# Altium PCB STM.PcbDoc
Units mm, origin at the board's own origin, x right, y up, seen from the top; angles counter-clockwise.
Board outline 82.75 x 86.5 mm, 4 copper layers (Top Layer, GND, Power, Bottom Layer), stack 0.651 mm thick; 136 components, 76 nets, 439 pads, 150 vias.
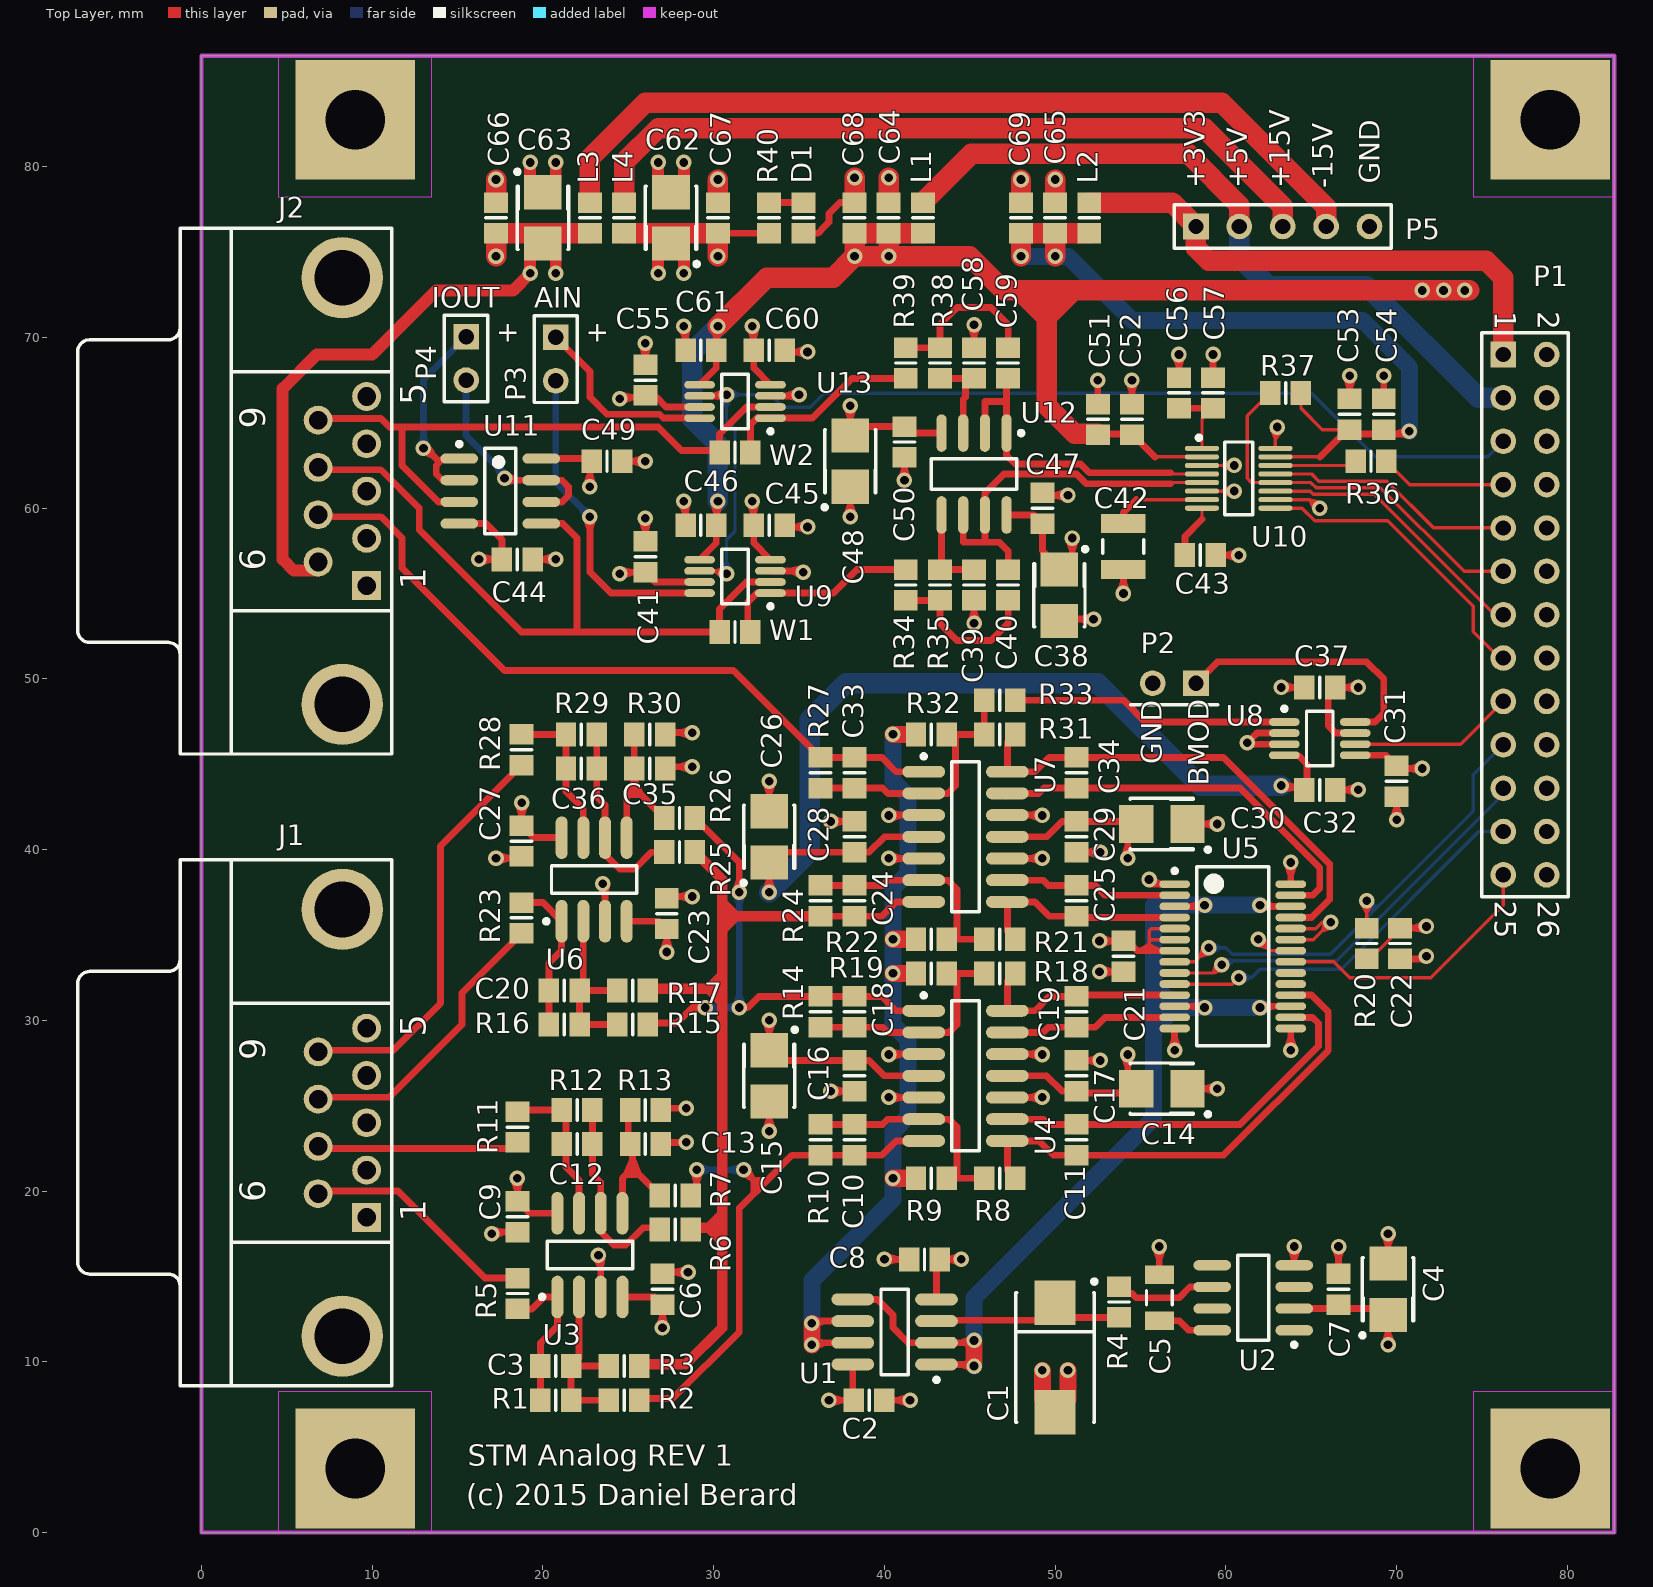
[diagram p0: Top Layer view]
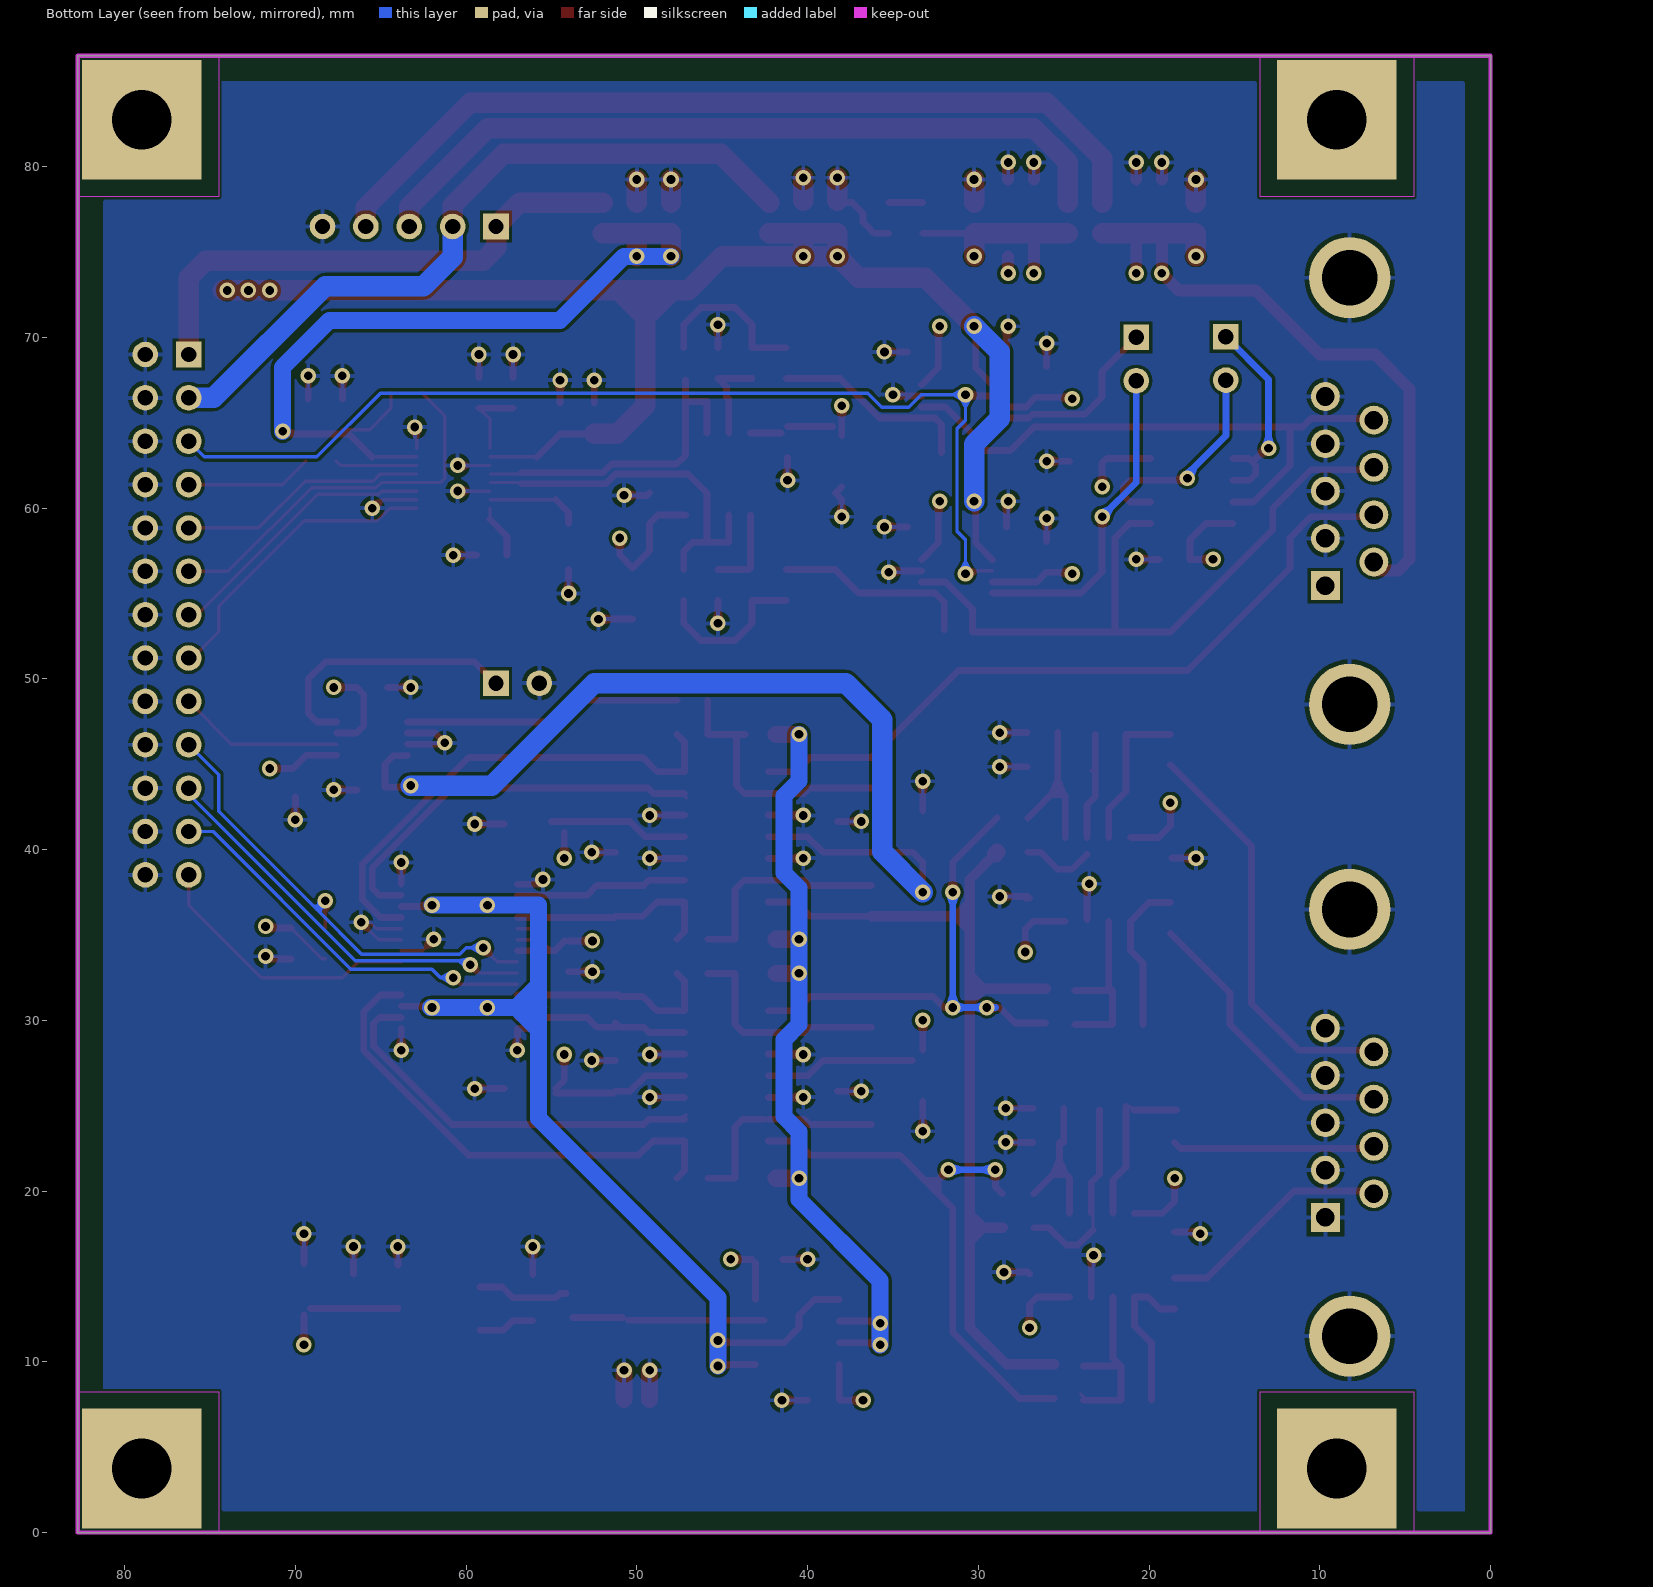
[diagram p1: Bottom Layer view, seen from below]
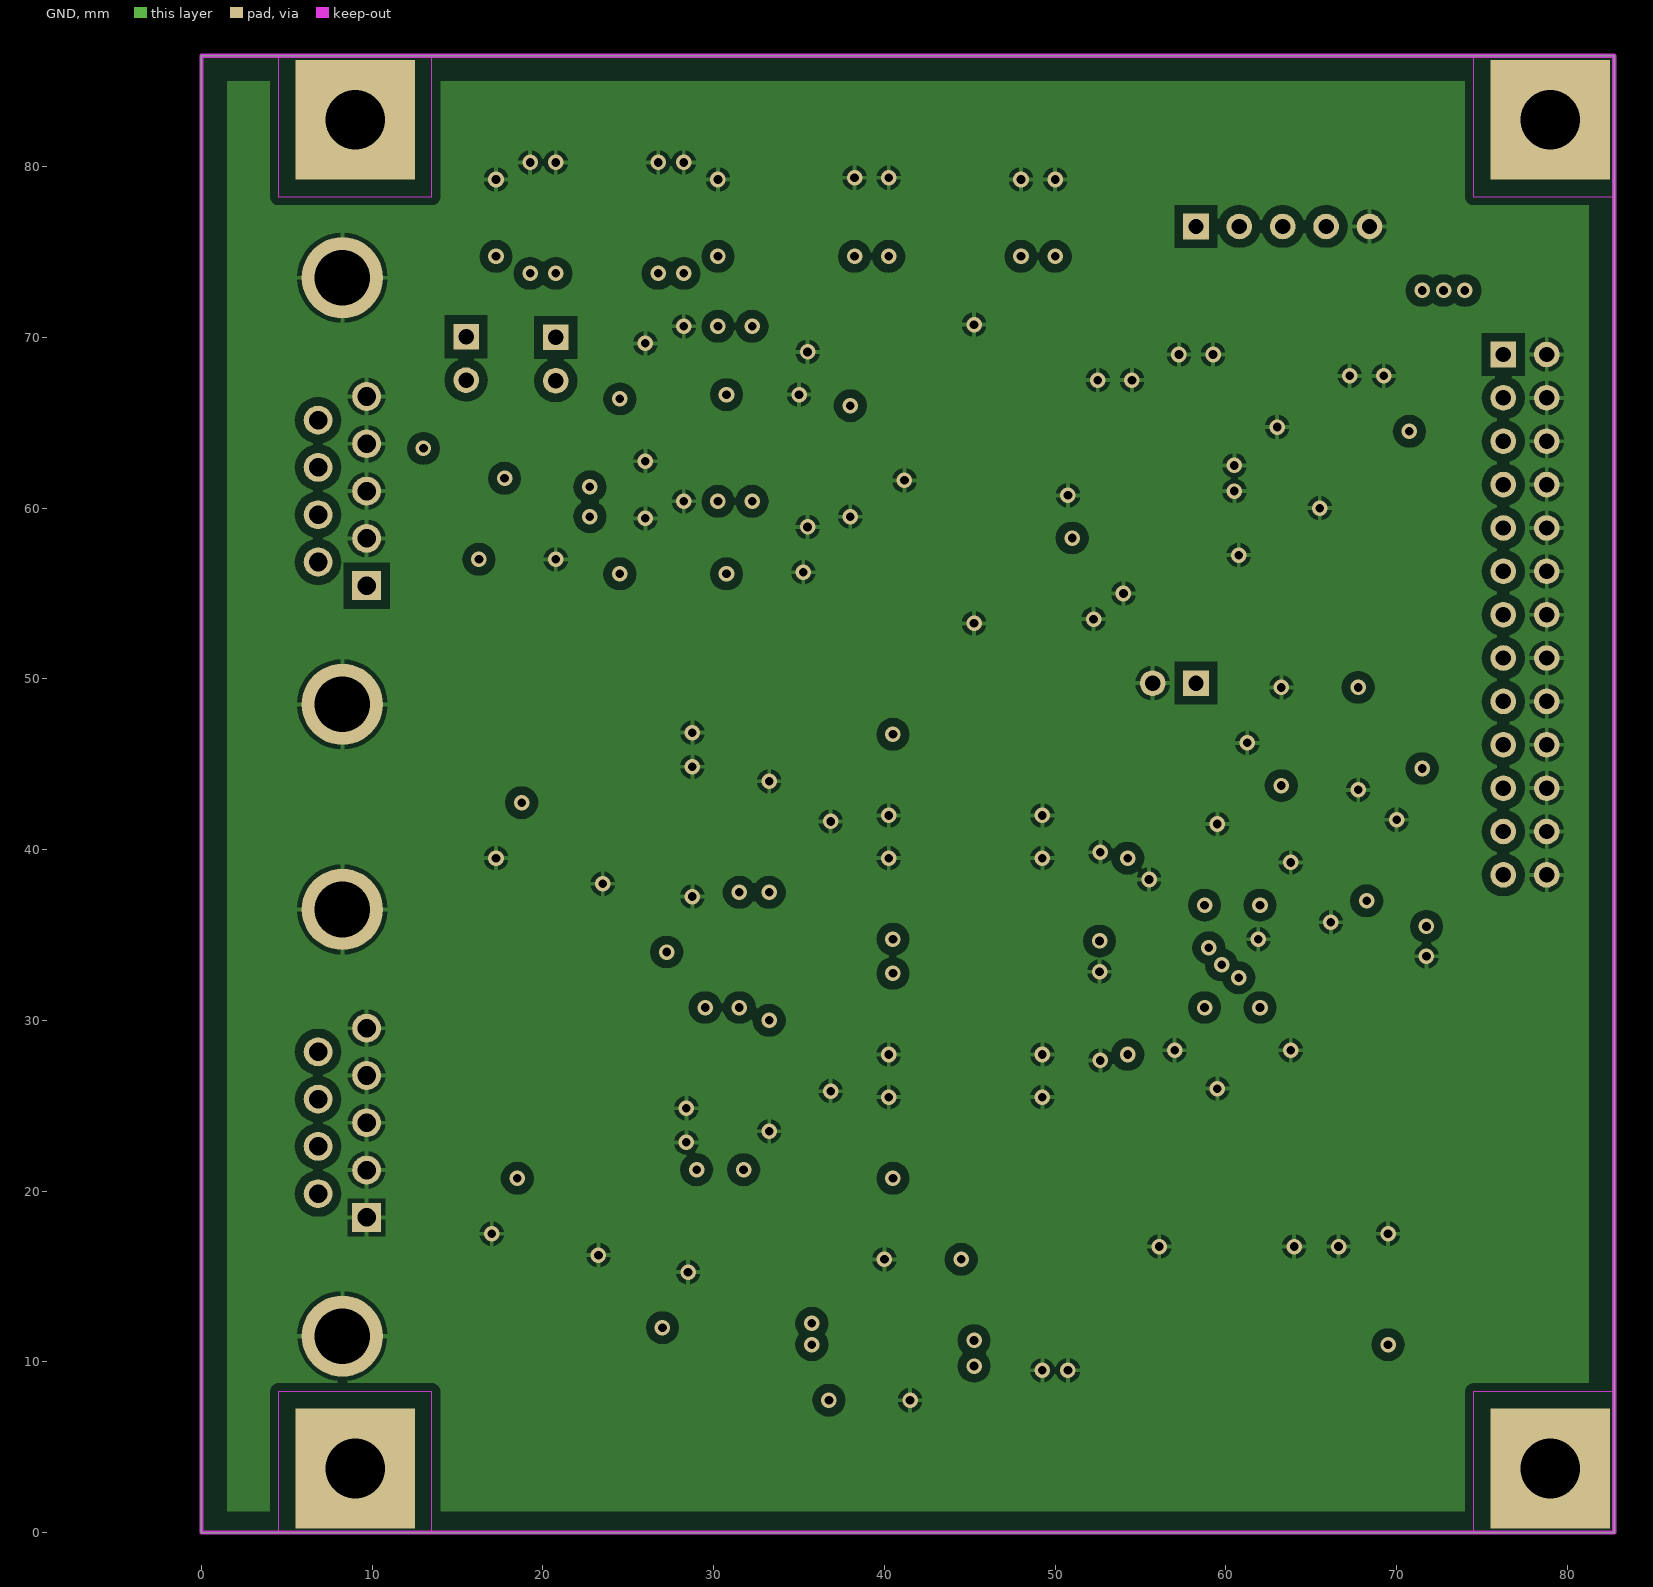
[diagram p2: GND]
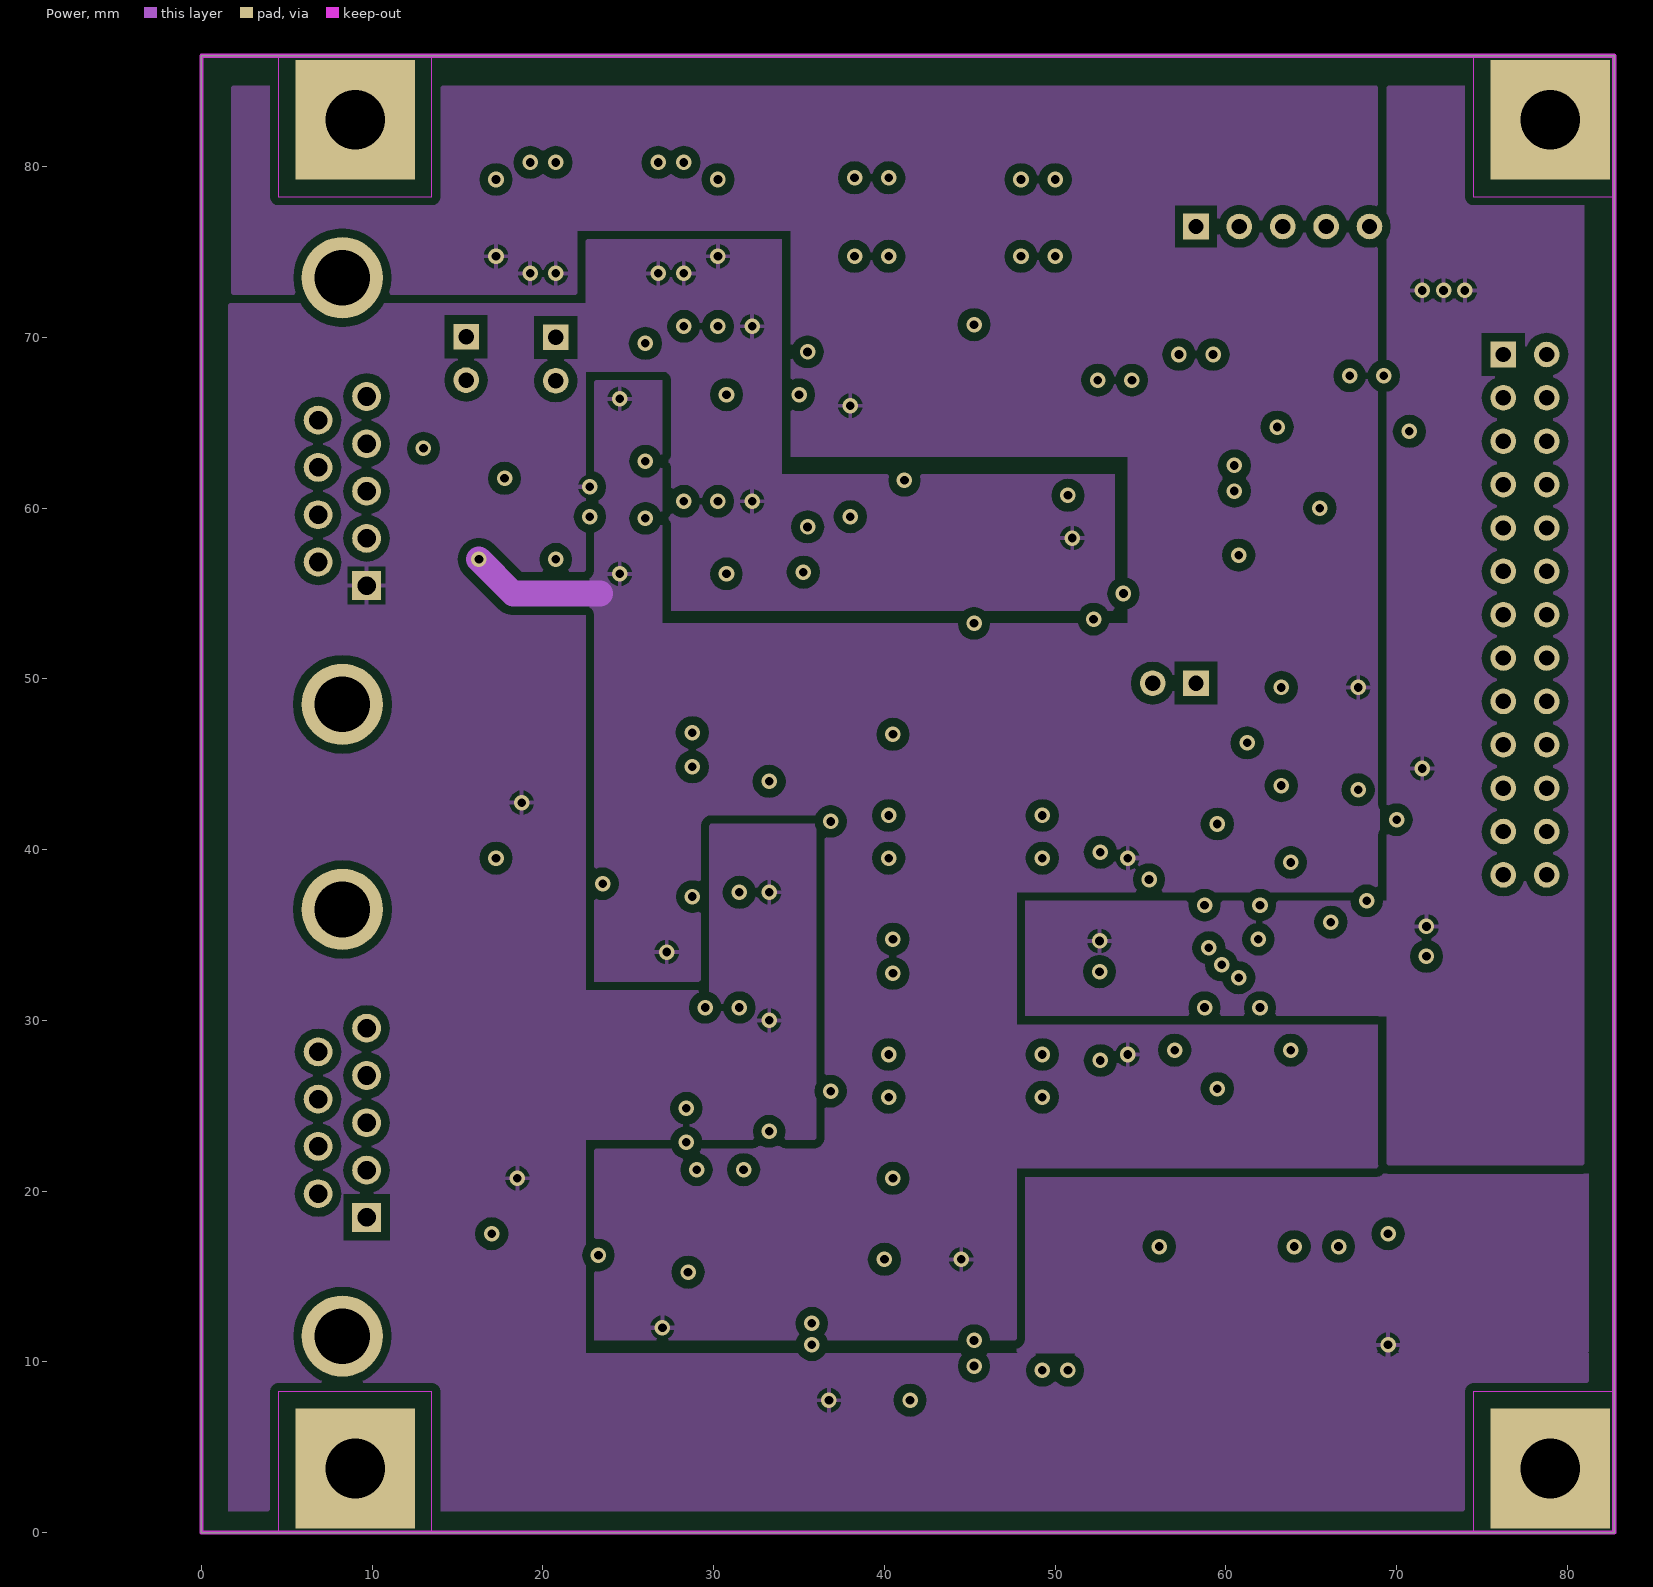
[diagram p3: Power]

## Layer stack, top to bottom
Top Solder: solder mask 0.0102, Solder Resist, Dk 3.5
Top Layer: signal copper 0.0356
Dielectric 1: prepreg 0.127, FR-4, Dk 4.2
GND: signal copper 0.036
Dielectric 5: core 0.254, Dk 4.2
Power: signal copper 0.036
Dielectric 6: prepreg 0.127, Dk 4.2
Bottom Layer: signal copper 0.0356
Bottom Solder: solder mask 0.0102, Solder Resist, Dk 3.5

## Board outline
0,0 0,86.5 82.75,86.5 82.75,0

## Design rules (kind name [scope] priority, off if disabled: settings)
Clearance [(InPolygon AND OnLayer('Power') OR OnLayer('GND'))] p1: gap=0.5
Clearance Clearance_1 [All] p2: gap=0.18
PolygonConnect [All] p1: connectstyle=Relief reliefconductorwidth=0.254 reliefentries=4 polygonreliefangle="90 Angle" airgapwidth=0.254
RoomDefinition ADC [InComponentClass('ADC')] p1: confinementstyle=ConfineIn formatcopy=TRUE lockcomponents=FALSE outline 10.75,51.75 74,51.75 74,73 10.75,73
RoomDefinition DAC [InComponentClass('DAC')] p2: confinementstyle=ConfineIn formatcopy=TRUE lockcomponents=FALSE outline 31.25,50.5 31.25,3.75 71.5,3.75 71.5,50.5
RoomDefinition "Piezo Driver" [InComponentClass('Piezo Driver')] p3: confinementstyle=ConfineIn formatcopy=TRUE lockcomponents=FALSE outline 30.25,6.5 30.25,49.75 16,49.75 16,6.5
RoutingVias [All] p1: holewidth=0.508 width=0.91 viastyle="Through Hole" minholewidth=0.5 minwidth=0.9 maxholewidth=0.711 maxwidth=1.27
SolderMaskExpansion [All] p1: expansion=0.102
UnpouredPolygon [All] p1: allowunpoured=FALSE
Width [All] p1: maxlimit=5 minlimit=0.2 preferedwidth=0.2 midlayer2_maxwidth=0.2 minimp=50.000000 maximp=50.000000 favimp=50.000000
29 further rules are at their usual default settings.

## Classes and differential pairs
component class ADC: C38 C39 C40 C41 C42 C43 C44 C45 C46 C47 C48 C49 C50 C51 C52 C53 C54 C55 C56 C57 C58 C59 C60 C61 R34 R35 R36 R37 R38 R39 U9 U10 U11 U12 U13 W1 W2
component class DAC: C1 C2 C4 C5 C7 C8 C10 C11 C14 C15 C16 C17 C18 C19 C21 C22 C24 C25 C26 C28 C29 C30 C31 C32 C33 C34 C37 R4 R8 R9 R10 R14 R18 R19 R20 R21 R22 R24 R27 R31 R32 R33 U1 U2 U4 U5 U7 U8
component class "Piezo Driver": C3 C6 C9 C12 C13 C20 C23 C27 C35 C36 R1 R2 R3 R5 R6 R7 R11 R12 R13 R15 R16 R17 R23 R25 R26 R28 R29 R30 U3 U6
component class Connectors: C62 C63 C64 C65 C66 C67 C68 C69 D1 J1 J2 L1 L2 L3 L4 P1 P2 P3 P4 P5 R40

## Components (designator, comment, footprint, x,y, rotation, side; value= is the part's Value field where it differs from the comment)
C1 "100uF" 7343 50,10.25 r270 top (schematic designator C18)
C2 "100nF" 6-0805_N 39.1,7.75 r180 top (schematic designator C25)
C3 "4.7nF" 6-0805_N 20.75,9.75 r180 top (schematic designator C45)
C4 "10uF" 3528 69.5,14.25 r90 top (schematic designator C19)
C5 "2.2uF" C1206 56.1,13.75 r90 top (schematic designator C22)
C6 "100nF" 6-0805_N 27,14.25 r90 top (schematic designator C53)
C7 "100nF" 6-0805_N 66.6,14.25 r90 top (schematic designator C32)
C8 "100nF" 6-0805_N 42.35,16 r180 top (schematic designator C38)
C9 "100nF" 6-0805_N 18.5,18.5 r90 top (schematic designator C51)
C10 "4.7nF" 6-0805_N 38.25,23 r270 top (schematic designator C20)
C11 "3.3nF" 6-0805_N 51.25,23 r270 top (schematic designator C31)
C12 "4.7nF" 6-0805_N 22,22.75 r180 top (schematic designator C44)
C13 "4.7nF" 6-0805_N 26,22.75 r180 top (schematic designator C49)
C14 "10uF" 3528 56.25,26 r180 top (schematic designator C40)
C15 "10uF" 3528 33.25,26.75 r270 top (schematic designator C21)
C16 "100nF" 6-0805_N 38.25,26.75 r90 top (schematic designator C26)
C17 "100nF" 6-0805_N 51.25,26.75 r90 top (schematic designator C39)
C18 "4.7nF" 6-0805_N 38.25,30.5 r90 top (schematic designator C17)
C19 "3.3nF" 6-0805_N 51.25,30.5 r90 top (schematic designator C28)
C20 "4.7nF" 6-0805_N 21.25,31.75 r0 top (schematic designator C46)
C21 "100nF" 6-0805_N 54,33.75 r90 top (schematic designator C33)
C22 "10uF" 6-0805_N 70.2,34.5 r270 top (schematic designator C36)
C23 "100nF" 6-0805_N 27.25,36.25 r90 top (schematic designator C54)
C24 "4.7nF" 6-0805_N 38.25,37 r270 top (schematic designator C16)
C25 "3.3nF" 6-0805_N 51.25,37 r270 top (schematic designator C47)
C26 "10uF" 3528 33.25,40.75 r90 top (schematic designator C72)
C27 "100nF" 6-0805_N 18.75,40.5 r90 top (schematic designator C52)
C28 "100nF" 6-0805_N 38.25,40.75 r270 top (schematic designator C24)
C29 "100nF" 6-0805_N 51.25,40.75 r270 top (schematic designator C37)
C30 "10uF" 3528 56.25,41.5 r180 top (schematic designator C41)
C31 "100nF" 6-0805_N 70,44 r90 top (schematic designator C84)
C32 "100nF" 6-0805_N 65.5,43.5 r180 top (schematic designator C75)
C33 "4.7nF" 6-0805_N 38.25,44.5 r90 top (schematic designator C23)
C34 "3.3nF" 6-0805_N 51.25,44.5 r90 top (schematic designator C43)
C35 "4.7nF" 6-0805_N 26.25,44.75 r180 top (schematic designator C50)
C36 "4.7nF" 6-0805_N 22.25,44.75 r0 top (schematic designator C48)
C37 "100nF" 6-0805_N 65.5,49.5 r180 top (schematic designator C85)
C38 "10uF" 3528 50.25,54.9 r270 top (schematic designator C35)
C39 "3.3nF" 6-0805_N 45.25,55.5 r270 top (schematic designator C29)
C40 "3.3nF" 6-0805_N 47.25,55.5 r270 top (schematic designator C5)
C41 "100nF" 6-0805_N 26,57.15 r90 top (schematic designator C15)
C42 "47uF" C1210 54,57.75 r90 top (schematic designator C3)
C43 "100nF" 6-0805_N 58.5,57.25 r180 top (schematic designator C2)
C44 "100nF" 6-0805_N 18.5,57 r0 top (schematic designator C34)
C45 "100nF" 6-0805_N 33.25,59 r180 top (schematic designator C7)
C46 "100nF" 6-0805_N 29.25,59 r0 top (schematic designator C9)
C47 "100nF" 6-0805_N 49.25,60 r270 top (schematic designator C6)
C48 "10uF" 3528 38,62.75 r90 top (schematic designator C71)
C49 "100nF" 6-0805_N 23.75,62.75 r180 top (schematic designator C30)
C50 "100nF" 6-0805_N 41.175,63.875 r270 top (schematic designator C13)
C51 "10uF" 6-0805_N 52.5,65.2 r90 top (schematic designator C42)
C52 "100nF" 6-0805_N 54.5,65.2 r270 top (schematic designator C11)
C53 "100nF" 6-0805_N 67.25,65.5 r270 top (schematic designator C12)
C54 "10uF" 6-0805_N 69.25,65.5 r90 top (schematic designator C70)
C55 "100nF" 6-0805_N 26,67.5 r90 top (schematic designator C14)
C56 "100nF" 6-0805_N 57.25,66.75 r270 top (schematic designator C73)
C57 "10uF" 6-0805_N 59.25,66.75 r90 top (schematic designator C4)
C58 "3.3nF" 6-0805_N 45.25,68.5 r90 top (schematic designator C27)
C59 "3.3nF" 6-0805_N 47.25,68.5 r90 top (schematic designator C1)
C60 "100nF" 6-0805_N 33.25,69.25 r180 top (schematic designator C8)
C61 "100nF" 6-0805_N 29.25,69.25 r0 top (schematic designator C10)
C62 "10uF" 3528 27.5,77 r90 top (schematic designator C80)
C63 "10uF" 3528 20,77 r270 top (schematic designator C82)
C64 "10uF" 6-0805_N 40.25,77 r90 top (schematic designator C86)
C65 "10uF" 6-0805_N 50,77 r90 top (schematic designator C78)
C66 "100nF" 6-0805_N 17.25,77 r270 top (schematic designator C83)
C67 "100nF" 6-0805_N 30.25,77 r90 top (schematic designator C81)
C68 "100nF" 6-0805_N 38.25,77 r90 top (schematic designator C87)
C69 "100nF" 6-0805_N 48,77 r90 top (schematic designator C79)
D1 "" 6-0805_N 35.25,77 r270 top (schematic designator D7)
J1 "D Connector 9" DSUB1.385-2H9 -1.25,24 r90 top
J2 "D Connector 9" DSUB1.385-2H9 -1.25,61 r90 top
L1 "600 Ohm" 6-0805_N 42.25,77 r90 top (schematic designator L2)
L2 "600 Ohm" 6-0805_N 52,77 r90 top (schematic designator L1)
L3 "600 Ohm" 6-0805_N 22.75,77 r90 top (schematic designator L4)
L4 "600 Ohm" 6-0805_N 24.75,77 r90 top (schematic designator L3)
P1 "Header 13X2" HDR2X13 76.25,69 r270 top (schematic designator P2)
P2 "Header 2" HDR1X2 58.25,49.75 r180 top (schematic designator P9)
P3 "Header 2" HDR1X2 20.75,70 r270 top (schematic designator P10)
P4 "Header 2" HDR1X2 15.5,70.04 r270 top
P5 "Header 5" HDR1X5 58.25,76.5 r0 top (schematic designator P8)
R1 "3k" 6-0805_N 20.75,7.75 r180 top (schematic designator R24)
R2 "3k" 6-0805_N 24.75,7.75 r180 top (schematic designator R28)
R3 "3k" 6-0805_N 24.75,9.75 r180 top (schematic designator R26)
R4 "1k" 6-0805_N 53.75,13.5 r270 top (schematic designator R14)
R5 "220" 6-0805_N 18.5,14 r90 top (schematic designator R30)
R6 "3k" 6-0805_N 27.75,17.75 r180 top (schematic designator R34)
R7 "3k" 6-0805_N 27.75,19.75 r180 top (schematic designator R38)
R8 "1.5k" 6-0805_N 46.75,20.75 r180 top (schematic designator R42)
R9 "3k" 6-0805_N 42.75,20.75 r0 top (schematic designator R15)
R10 "3k" 6-0805_N 36.25,23 r270 top (schematic designator R16)
R11 "220" 6-0805_N 18.5,23.75 r270 top (schematic designator R36)
R12 "3k" 6-0805_N 22,24.75 r180 top (schematic designator R32)
R13 "3k" 6-0805_N 26,24.75 r180 top (schematic designator R40)
R14 "3k" 6-0805_N 36.25,30.5 r90 top (schematic designator R10)
R15 "3k" 6-0805_N 25.25,29.75 r180 top (schematic designator R29)
R16 "3k" 6-0805_N 21.25,29.75 r0 top (schematic designator R25)
R17 "3k" 6-0805_N 25.25,31.75 r180 top (schematic designator R27)
R18 "1.5k" 6-0805_N 46.75,32.75 r180 top (schematic designator R13)
R19 "3k" 6-0805_N 42.75,32.75 r0 top (schematic designator R9)
R20 "10k" 6-0805_N 68.25,34.5 r270 top (schematic designator R17)
R21 "1.5k" 6-0805_N 46.75,34.75 r180 top (schematic designator R7)
R22 "3k" 6-0805_N 42.75,34.75 r0 top (schematic designator R4)
R23 "220" 6-0805_N 18.75,36 r270 top (schematic designator R31)
R24 "3k" 6-0805_N 36.25,37 r270 top (schematic designator R5)
R25 "3k" 6-0805_N 28,39.85 r180 top (schematic designator R35)
R26 "3k" 6-0805_N 28,41.85 r180 top (schematic designator R39)
R27 "3k" 6-0805_N 36.25,44.5 r90 top (schematic designator R21)
R28 "220" 6-0805_N 18.75,45.85 r270 top (schematic designator R37)
R29 "3k" 6-0805_N 22.25,46.75 r180 top (schematic designator R33)
R30 "3k" 6-0805_N 26.25,46.75 r180 top (schematic designator R41)
R31 "1.5k" 6-0805_N 46.75,46.75 r180 top (schematic designator R23)
R32 "3k" 6-0805_N 42.75,46.75 r0 top (schematic designator R20)
R33 "30k" 6-0805_N 46.75,48.75 r0 top (schematic designator R19)
R34 "470" 6-0805_N 41.25,55.5 r270 top (schematic designator R2)
R35 "470" 6-0805_N 43.25,55.5 r90 top (schematic designator R8)
R36 "100" 6-0805_N 68.5,62.75 r180 top (schematic designator R6)
R37 "10k" 6-0805_N 63.5,66.75 r0 top (schematic designator R12)
R38 "470" 6-0805_N 43.25,68.5 r270 top (schematic designator R3)
R39 "470" 6-0805_N 41.25,68.5 r90 top (schematic designator R1)
R40 "3k" 6-0805_N 33.25,77 r270 top (schematic designator R43)
U1 "OPA2227" ADI-R-8_M 40.6,11.75 r180 top (schematic designator U9)
U2 "REF102" 182H_N 61.6,13.75 r180 top (schematic designator U11)
U3 "OPA2227" ADI-R-8_M 22.75,16.25 r90 top (schematic designator U14)
U4 "OPA4227" TI-D14_M 44.75,26.75 r0 top (schematic designator U7)
U5 "DAC8814" TI-DB28_L 60.4,33.75 r0 top (schematic designator U8)
U6 "OPA2227" ADI-R-8_M 23,38.25 r90 top (schematic designator U15)
U7 "OPA4227" TI-D14_M 44.75,40.75 r0 top (schematic designator U5)
U8 "ADG419" ADI-RM-8_N 65.5,46.5 r0 top (schematic designator U6)
U9 "ADG419" ADI-RM-8_N 31.25,56 r180 top (schematic designator U3)
U10 "LTC2326-16" MSOP-16 60.75,61.75 r0 top (schematic designator U4)
U11 "OPA2227" TI-D8_N 17.5,61 r0 top (schematic designator U16)
U12 "LT1469" LT-S8-8_N 45.25,62 r270 top (schematic designator U1)
U13 "ADG419" ADI-RM-8_N 31.25,66.25 r180 top (schematic designator U2)
W1 "0-Ohm Jumper" 6-0805_N 31.25,52.75 r0 top (schematic designator W2)
W2 "0-Ohm Jumper" 6-0805_N 31.25,63.25 r0 top (schematic designator W1)

## Footprints (in the part's own frame and the unit in brackets; to place one, negate y for a bottom-side part, rotate by r counter-clockwise, add the part's x,y. Pads: shape width x height; smd on the part's side, far side on the other; paste and mask are expansions set on the pad)
6-0805_N [mm] "Chip Resistor, Body 2.0x1.2mm, IPC Medium Density"
  rect 1.2x1.4 smd: 1(-0.9,0) 2(0.9,0)
  silkscreen extent 0,-0.6 0,0.6, body extent -1.07,-0.7 1.07,0.7, height 0.7
182H_N [mm] "SOIC, 8-Leads, Body 4.9x3.9mm, Pitch 1.27mm, IPC Medium Density"
  oval 2.2x0.6 smd: 1(-2.4,1.905) 2(-2.4,0.635) 3(-2.4,-0.635) 4(-2.4,-1.905) 5(2.4,-1.905) 6(2.4,-0.635) 7(2.4,0.635) 8(2.4,1.905)
  silkscreen extent -2.53,-2.5 0.9,2.88, body extent -1.95,-2.45 1.95,2.45, height 1.75
3528 [mm] "Capacitor, SM Tantalum; Body 3.5 x 2.8 mm (LxW typ)"
  rect 2x2.2 smd: 1(-1.5,0) 2(1.5,0)
  silkscreen extent -2.82,-1.5 1.85,1.62
7343 [mm] "Capacitor, SM Tantalum; Body 7.3 x 4.3 mm (LxW typ)"
  rect 2.6x2.4 smd: 1(-3.2,0) 2(3.2,0)
  silkscreen extent -4.57,-2.3 3.8,2.43
ADI-R-8_M [mm] "SOIC, 8-Leads, Body 4.9x3.9mm, Pitch 1.27mm, IPC Low Density"
  oval 2.5x0.7 smd: 1(-2.45,1.905) 2(-2.45,0.635) 3(-2.45,-0.635) 4(-2.45,-1.905) 5(2.45,-1.905) 6(2.45,-0.635) 7(2.45,0.635) 8(2.45,1.905)
  silkscreen extent -2.58,-2.5 0.8,2.93, body extent -2,-2.5 2,2.5, height 1.75
ADI-RM-8_N [mm] "SOP, 8-Leads, Body 3x3mm, Pitch 0.65mm, IPC Medium Density"
  oval 1.8x0.45 smd: 1(-2.075,0.975) 2(-2.075,0.325) 3(-2.075,-0.325) 4(-2.075,-0.975) 5(2.075,-0.975) 6(2.075,-0.325) 7(2.075,0.325) 8(2.075,0.975)
  silkscreen extent -2.2,-1.6 0.77,1.87, body extent -1.6,-1.6 1.6,1.6, height 1.1
C1206 [mm] "Chip Capacitor, Body 3.2x1.6mm, IPC High Density"
  rect 1.1x1.7 smd: 1(-1.35,0) 2(1.35,0)
  silkscreen extent -0.4,-0.75 0.4,0.75, body extent -1.7,-0.9 1.7,0.9, height 1.3
C1210 [mm] "Chip Capacitor, Body 3.2x2.5mm, IPC High Density"
  rect 1.1x2.6 smd: 1(-1.35,0) 2(1.35,0)
  silkscreen extent -0.4,-1.2 0.4,1.2, body extent -1.7,-1.35 1.7,1.35, height 1.3
DSUB1.385-2H9 [mm] "Connector; D Subminiature; 9 Position; Right Angle; Pitch 1.385 mm"
  rect 1.69x1.69 hole 1.09: 1(-5.54,-10.92)
  round 1.69 hole 1.09: 2(-2.77,-10.92) 3(0,-10.92) 4(2.77,-10.92) 5(5.54,-10.92) 6(-4.155,-8.08) 7(-1.385,-8.08) 8(1.385,-8.08) 9(4.155,-8.08)
  round 4.76 hole 3.26: 10(-12.495,-9.5) 11(12.495,-9.5)
  silkscreen extent -15.4,-12.4 15.4,6
HDR1X2 [mm] "Connector; Header; 2 Position"
  rect 1.5x1.5 hole 0.9: 1(0,0)
  round 1.5 hole 0.9: 2(2.54,0)
  silkscreen extent -1.27,1.27 3.81,1.27
HDR1X5 [mm] "Connector; Header; 5 Position"
  rect 1.5x1.5 hole 0.9: 1(0,0)
  round 1.5 hole 0.9: 2(2.54,0) 3(5.08,0) 4(7.62,0) 5(10.16,0)
  silkscreen extent -1.27,-1.27 11.43,1.27
HDR2X13 [mm] "Connector; Header; 13x2 Position"
  rect 1.5x1.5 hole 0.9: 1(0,0)
  round 1.5 hole 0.9: 2(0,2.54) 3(2.54,0) 4(2.54,2.54) 5(5.08,0) 6(5.08,2.54) 7(7.62,0) 8(7.62,2.54) 9(10.16,0) 10(10.16,2.54) 11(12.7,0) 12(12.7,2.54) 13(15.24,0) 14(15.24,2.54) 15(17.78,0) 16(17.78,2.54) 17(20.32,0) 18(20.32,2.54) 19(22.86,0) 20(22.86,2.54) 21(25.4,0) 22(25.4,2.54) 23(27.94,0) 24(27.94,2.54) 25(30.48,0) 26(30.48,2.54)
  silkscreen extent -1.27,-1.27 31.75,3.81
LT-S8-8_N [mm] "SOIC, 8-Leads, Body 4.9x3.9mm, Pitch 1.27mm, IPC Medium Density"
  oval 2.2x0.6 smd: 1(-2.4,1.905) 2(-2.4,0.635) 3(-2.4,-0.635) 4(-2.4,-1.905) 5(2.4,-1.905) 6(2.4,-0.635) 7(2.4,0.635) 8(2.4,1.905)
  silkscreen extent -2.52,-2.5 0.9,2.88, body extent -2,-2.5 2,2.5, height 1.76
MSOP-16 [mm] "3.0mm X 4.04mm MSOP-16, 0.5mm pitch"
  oval 2x0.305 smd: 1(-2.15,1.75) 2(-2.15,1.25) 3(-2.15,0.75) 4(-2.15,0.25) 5(-2.15,-0.25) 6(-2.15,-0.75) 7(-2.15,-1.25) 8(-2.15,-1.75) 9(2.15,-1.75) 10(2.15,-1.25) 11(2.15,-0.75) 12(2.15,-0.25) 13(2.15,0.25) 14(2.15,0.75) 15(2.15,1.25) 16(2.15,1.75)
  silkscreen extent -2.45,-2.12 0.82,2.5, body extent -1.5,-2.02 1.5,2.02, height 2
TI-D8_N [mm] "SOIC, 8-Leads, Body 4.9x3.9mm, Pitch 1.27mm, IPC Medium Density"
  oval 2.2x0.6 smd: 1(-2.4,1.905) 2(-2.4,0.635) 3(-2.4,-0.635) 4(-2.4,-1.905) 5(2.4,-1.905) 6(2.4,-0.635) 7(2.4,0.635) 8(2.4,1.905)
  silkscreen extent -2.52,-2.5 0.9,2.88, body extent -2,-2.5 2,2.5, height 1.75
TI-D14_M [mm] "SOIC, 14-Leads, Body 8.65x3.9mm, Pitch 1.27mm, IPC Low Density"
  oval 2.5x0.7 smd: 1(-2.45,3.81) 2(-2.45,2.54) 3(-2.45,1.27) 4(-2.45,0) 5(-2.45,-1.27) 6(-2.45,-2.54) 7(-2.45,-3.81) 8(2.45,-3.81) 9(2.45,-2.54) 10(2.45,-1.27) 11(2.45,0) 12(2.45,1.27) 13(2.45,2.54) 14(2.45,3.81)
  silkscreen extent -2.57,-4.4 0.8,4.83, body extent -2,-4.38 2,4.38, height 1.75
TI-DB28_L [mm] "SOP, 28-Leads, Body 10.2x5.3mm, Pitch 0.65mm, IPC High Density"
  oval 1.8x0.45 smd: 1(-3.4,4.225) 2(-3.4,3.575) 3(-3.4,2.925) 4(-3.4,2.275) 5(-3.4,1.625) 6(-3.4,0.975) 7(-3.4,0.325) 8(-3.4,-0.325) 9(-3.4,-0.975) 10(-3.4,-1.625) 11(-3.4,-2.275) 12(-3.4,-2.925) 13(-3.4,-3.575) 14(-3.4,-4.225) 15(3.4,-4.225) 16(3.4,-3.575) 17(3.4,-2.925) 18(3.4,-2.275) 19(3.4,-1.625) 20(3.4,-0.975) 21(3.4,-0.325) 22(3.4,0.325) 23(3.4,0.975) 24(3.4,1.625) 25(3.4,2.275) 26(3.4,2.925) 27(3.4,3.575) 28(3.4,4.225)
  silkscreen extent -3.52,-5.25 2.1,5.25, body extent -2.8,-5.25 2.8,5.25, height 2

## Part data
C1 C4 C14 C15 C22 C26 C30 C38 C48 C51 C54 C57 C62 C63 C64 C65: library part "Cap Pol1", "Polarized Capacitor (Radial)"
C2 C3 C5 C6 C7 C8 C9 C10 C11 C12 C13 C16 C17 C18 C19 C20 C21 C23 C24 C25 C27 C28 C29 C31 C32 C33 C34 C35 C36 C37 C39 C40 C41 C42 C43 C44 C45 C46 C47 C49 C50 C52 C53 C55 C56 C58 C59 C60 C61 C66 C67 C68 C69: library part Cap, "Capacitor"
D1: library part LED0, "Typical INFRARED GaAs LED"
J1 J2: "Receptacle Assembly, 9 Position, Right Angle"
L1 L2 L3 L4: library part Inductor, "Inductor"
P1: "Header, 13-Pin, Dual row"
P2 P3 P4: "Header, 2-Pin"
P5: "Header, 5-Pin"
R1 R2 R3 R4 R5 R6 R7 R8 R9 R10 R11 R12 R13 R14 R15 R16 R17 R18 R19 R20 R21 R22 R23 R24 R25 R26 R27 R28 R29 R30 R31 R32 R33 R34 R35 R36 R37 R38 R39 R40: library part Res1, "Resistor"
U1 U3 U6: library part CMP-0384-01147-2, "Double Channel Wide Bandwidth Operational Amplifier, 10 MHz BW, 2.5 V/us SR, Industrial, 8-pin SOIC (R-8), Tube"
U2: library part REF102AU, "Precision Voltage Reference"
U4 U7: library part CMP-0272-00152-2, "High Precision, Low Noise Operational Amplifier, 5 to 36 V, -40 to 85 degC, 14-pin SOIC (D14), Green (RoHS & no Sb/Br)"
U5: library part CMP-0004-00286-1, "16-Bit, Quad, Serial Input Multiplying Digital to Analog Converter, -40 to 85 degC, 28-pin SOP (DB28), Green (RoHS & no Sb/Br)"
U8 U9 U13: library part CMP-0792-00196-1, "LC2MOS Precision Mini-DIP Analog Switches, 25 Ohm Ron, 8-pin SOP (RM-8), Tube"
U11: library part CMP-0272-00267-2, "High Precision, Low Noise Operational Amplifier, 5 to 36 V, -40 to 85 degC, 8-pin SOIC (D8), Green (RoHS & no Sb/Br)"
U12: library part CMP-0359-02956-2, "Dual Channel, 16-Bit Accurate Operational Amplifier, 200 MHz Typical GBW, 30 V/us Typical SR, 10 to 36 V, 8-Pin SOIC (S8-8), Commercial, Pb-Free"
W1 W2: library part Jumper, "Jumper Wire"

## Free pads (board coordinates)
  rect 7x7 hole 3.5: 0(9,82.75) 0(9,3.75) 0(79,82.75) 0(79,3.75)

## Via types
v1: diameter 0.91, hole 0.508, Top Layer to Bottom Layer, 150 vias

## Nets (pads, with @x,y where several pads share a name; then routed paths per layer and width w, separated by ;. In a path a pad name is that pad's centre, name@x,y a point inside that pad or via, vN(x,y) a via of type N, cw(c..) or ccw(c..) an arc to the next point about the centre after c; other vN are vias at no path point)
+3V3: C53.2 C54.1 C65.1 C69.1 L2.1 R37.2 U10.15 | length 48.6
  Top Layer w0.2: U10.15 65.5,63 ; R37.2 64.4,65.85 65.65,64.6 C53.2
  Top Layer w0.4: 65.5,63 66.85,64.35 70.6,64.35 v1(70.75,64.5)
  Top Layer w1.2: v1(48,74.75) C69.1 C65.1 ; v1(50,74.75) C65.1 ; L2.1 C65.1
  Bottom Layer w1: v1(48,74.75) 50.75,74.75 54.5,71 68,71 70.75,68.25 v1(70.75,64.5)
+3V3_DIG: L2.2 P1.1 P5.1 | length 31.3
  Top Layer w1.2: L2.2 56.85,77.9 P5.1 58.25,75.25 59,74.5 75.25,74.5 76.25,73.5 P1.1
+5V: C21.2 C22.1 C31.2 C46.2 C51.1 C52.2 C61.2 C64.1 C68.1 L1.1 R20.2 U5.5 U5.6 U5.7 U8.5 U9.5 U10.2 U13.5 | length 106.3
  Top Layer w0.2: C21.2 C21.2@54.25,34.65 ; 55.5,34.075 55.5,35.25 55.625,35.375 U5.5 ; 55.563,34.725 U5.6 ; 55.85,63 U10.2 ; R20.2 68.45,33.6 C22.1@70.25,35.4
  Top Layer w0.4: U9.5 30.15,57.95 v1@30.15,60.3 ; U13.5 30.15,68.2 v1@30.15,70.5 ; C51.1@52.5,64.35 54.5,64.35 55.85,63 ; v1(52.6,34.65) C21.2 ; C21.2@54.25,34.65 54.825,34.075 55.5,34.075 U5.7 ; U8.5 69.375,45.525 C31.2 ; C31.2@70.15,44.75 v1(71.5,44.75) ; C22.1@70.25,35.4 71.65,35.4 v1(71.75,35.5)
  Top Layer w1.2: v1(30.25,70.65) 33.1,73.5 37,73.5 v1(38.25,74.75) ; L1.1 C64.1 ; 49.5,72.75 49.5,66 51.15,64.35 C51.1@52.5,64.35 ; v1@74.25,72.75 47,72.75 45,74.75 v1(40.25,74.75) ; v1(38.25,74.75) v1(40.25,74.75) ; v1(38.25,74.75) C68.1 C64.1 ; v1(40.25,74.75) C64.1
  Bottom Layer w1.2: v1(30.25,60.4) 30.25,63.75 28.75,65.25 28.75,69.15 v1(30.25,70.65)
  other v1: 71.5,72.75 72.75,72.75 74,72.75
+5V_DIG: L1.2 P1.3 P5.2 | length 42.9
  Top Layer w1.2: L1.2 45.1,80.75 57.79,80.75 60.79,77.75 P5.2
  Bottom Layer w1.2: P5.2 60.79,74.71 62.5,73 68.253,73 74.793,66.46 P1.3
+15V: C2.2 C4.1 C7.1 C9.2 C15.1 C16.2 C26.1 C27.2 C28.2 C32.2 C38.1 C45.2 C47.2 C49.2 C60.2 C62.1 C67.1 J2.1 L4.1 R40.2 U1.8 U2.2 U3.8 U4.4 U6.8 U7.4 U8.4 U9.4 U11.8 U12.8 U13.4 | length 117.9
  Top Layer w0.4: v1(18.5,20.75) C9.2 19.2,18.7 U3.8 ; v1@18.75,42.5 C27.2 19.45,40.7 U6.8 ; U11.8 22.495,62.905 22.75,62.65 v1(22.75,61.25) ; C67.1 R40.2 ; v1@32.35,60.25 32.35,57.95 U9.4 ; v1@32.35,70.55 32.35,68.2 U13.4 ; C15.1 v1(33.25,30) ; v1(33.25,37.5) C26.1 33.85,39.85 C28.2 39.1,39.85 40,40.75 U7.4 ; C15.1@33.85,27.65 C16.2 39.1,27.65 40,26.75 U4.4 ; v1(36.75,7.75) C2.2@38.1,7.75 ; C2.2@38.15,7.8 U1.8 ; U12.8 48.75,59.6 C47.2 49.25,57.5 50.25,56.5 51,57.25 v1(51,58.25) ; U8.4 63.45,45.5 64.25,45.5 64.75,45 64.75,43.65 v1@63.6,43.65 ; U2.2 C4.1@69.135,13.115 ; v1(69.5,11) C4.1
  Top Layer w0.7: v1(26.75,73.75) C62.1@26.75,75.5 ; v1(28.25,73.75) C62.1@28.25,74.75
  Top Layer w1.2: L4.1 C67.1 v1(30.25,74.75)
  Bottom Layer w1.2: v1(33.25,37.5) 35.615,39.865 35.615,47.615 37.75,49.75 52.5,49.75 58.5,43.75 v1(63.25,43.75)
  other v1: 18.75,42.75 32.25,60.4 32.25,70.65
-15V: C6.1 C8.1 C14.2 C17.1 C23.1 C29.1 C30.2 C37.1 C41.1 C44.1 C48.2 C50.1 C55.1 C63.2 C66.2 J2.6 L3.1 U1.4 U3.4 U4.11 U6.4 U7.11 U8.7 U9.7 U11.4 U12.4 U13.7 | length 105.4
  Top Layer w0.4: U11.4 16.655,59.095 17.6,58.15 C44.1 v1(16.25,57) ; v1@24.6,56.25 C41.1 26.575,55.675 U9.7 ; v1@24.6,66.5 26.64,66.5 27.215,65.925 U13.7 ; U3.4 26.55,13.8 C6.1 v1(27,12) ; U6.4 26.8,35.8 C23.1 v1(27.25,34) ; C48.2 v1(38,66) ; C48.2@38.525,64.775 C50.1 ; C50.1@41.55,64.4 U12.4 ; U1.4 C8.1@43.05,15.8 ; C8.1 v1(44.5,16) ; U4.11 49.5,26.75 50.4,25.85 C17.1 51.35,25.75 C14.2@54.75,25.75 ; U7.11 49.5,40.75 50.4,41.65 C29.1 C30.2@55,41.65 ; v1(54.25,28) 54.25,26.5 C14.2 ; v1(54.25,39.5) C30.2@54.25,41 ; v1@67.5,49.5 C37.1 66,49.1 66,47.25 66.425,46.825 U8.7
  Top Layer w0.7: J2.6@6.83,56.345 5.405,56.345 4.75,57 4.75,67 6.75,69 10,69 13.75,72.75 18.25,72.75 v1(19.25,73.75) C63.2@19.25,75.5 ; v1(20.75,73.75) C63.2@20.75,75.5
  Top Layer w1.2: v1(17.25,74.75) C66.2 L3.1
  Power w1.5: v1(16.25,57) 18.25,55 23.35,55
  other v1: 67.75,49.5 24.5,56.15 24.5,66.4
AIN+: P3.1 U13.8 | length 11.3
  Top Layer w0.4: P3.1 22.75,68 22.75,66.5 23.75,65.5 26.82,65.5 27.045,65.275 U13.8
AIN-: P3.2 U9.8 | length 19
  Top Layer w0.4: v1(22.75,59.5) 22.75,56.25 23.975,55.025 U9.8
  Bottom Layer w0.4: P3.2 20.75,61.5 v1(22.75,59.5)
BIAS: C33.2 J2.7 R27.2 U7.1 | length 42.8
  Top Layer w0.4: J2.7@6.83,59.115 7.215,59.5 10.5,59.5 11.75,58.25 11.75,56.5 17.75,50.5 31.15,50.5 R27.2 C33.2 39.85,45.4 40.69,44.56 U7.1
BIAS_MOD: P2.1 U8.8 | length 16.1
  Top Layer w0.4: P2.1@58.25,49.5 P2.1 59.5,51 68.25,51 69.25,50 69.25,48 68.725,47.475 U8.8
BIAS_MOD_EN: P1.17 U8.6 | length 9.7
  Top Layer w0.2: U8.6 73.745,46.175 P1.17
BUSY: P1.13 U10.11 | length 16.3
  Top Layer w0.2: U10.11 64.945,61 65.127,60.818 68.682,60.818 75.74,53.76 P1.13
CNV: P1.15 U10.9 | length 17.9
  Top Layer w0.2: U10.9 64.461,60 65.196,59.265 69.485,59.265 74.5,54.25 74.5,52.75 76.03,51.22 P1.15
GND: C1.2 C2.1 C4.2 C5.2 C6.2 C7.2 C8.2 C9.1 C13.1 C14.1 C15.2 C16.1 C17.2 C21.1 C22.2 C23.2 C26.2 C27.1 C28.1 C29.2 C30.1 C31.1 C32.1 C35.1 C37.2 C38.2 C39.2 C41.2 C42.1 C43.1 C44.2 C45.1 C46.1 C47.1 C48.1 C49.1 C50.2 C51.2 C52.1 C53.1 C54.2 C55.2 C56.1 C57.2 C58.2 C60.1 C61.1 C62.2 C63.1 C64.2 C65.2 C66.1 C67.2 C68.2 C69.2 D1.2 J1.1 J1.2 J1.3 J1.4 J1.5 J1.10 J1.11 J2.2 J2.3 J2.4 J2.5 J2.10 J2.11 P1.2 P1.4 P1.6 P1.8 P1.10 P1.12 P1.14 P1.16 P1.18 P1.20 P1.22 P1.24 P1.26 P2.2 P5.5 R13.1 R30.1 U2.4 U3.3 U4.3 U4.5 U4.10 U4.12 U5.1 U5.14 U5.15 U5.22 U5.23 U5.24 U5.28 U6.3 U7.3 U7.5 U7.10 U7.12 U8.2 U8.3 U9.3 U10.3 U10.6 U10.10 U10.16 U13.3 | length 141.7
  Top Layer w0.2: U5.1@56.425,37.975 U5.1 ; U10.6 v1@60.75,61 ; U10.3 v1@60.75,62.5 ; v1(61.9,34.75) 62.575,34.075 U5.22 ; U10.10 64.908,60.5 65.408,60 v1(65.5,60) ; U10.16 v1@62.9,64.65 ; U5.23 65.125,34.725 v1(66.15,35.75) 65.65,35.75 65.275,35.375 U5.24
  Top Layer w0.4: v1(17,17.5) 17.1,17.6 C9.1 ; v1(17.25,39.5) C27.1@18.65,39.5 ; C66.1 v1(17.25,79.25) ; C44.2 v1(20.75,57) ; U3.3 v1@23.385,16.115 ; v1(23.5,38) 23.635,37.865 U6.3@23.635,35.9 ; C49.1 v1(26,62.75) ; C41.2 v1(26,59.4) ; C55.2@26,68.3 v1(26,69.65) ; C13.1@26.8,22.85 27.9,22.85 ; R13.1@26.8,24.85 27.9,24.85 ; C6.2 27.1,15.25 v1(28.5,15.25) ; C35.1@27.15,44.85 v1(28.75,44.85) ; R30.1@27.15,46.85 v1(28.75,46.85) ; C23.2 27,37.15 27.1,37.25 v1(28.75,37.25) ; C46.1@28.35,58.9 v1@28.35,60.25 ; C61.1@28.35,69.15 v1@28.35,70.5 ; v1@33.25,23.75 C15.2 ; C26.2 v1@33.25,43.75 ; U9.3 35.175,56.325 v1(35.25,56.25) ; U13.3 34.925,66.575 v1(35,66.65) ; C45.1@34.15,58.9 v1(35.5,58.9) ; C60.1@34.15,69.15 v1@35.25,69.15 ; D1.2 36.1,76.1 36.5,76.5 36.75,76.75 36.75,77.25 37.4,77.9 C68.2 ; v1(36.85,25.85) C16.1 ; v1(36.85,41.65) C28.1 ; v1(38,59.5) 38,60.5 38.375,60.875 C48.1 ; C2.1 v1(41.5,7.75) ; v1(40,16) C8.2 ; v1@40.27,25.48 U4.5 ; v1@40.27,28.02 U4.3 ; v1@40.27,39.48 U7.5 ; v1@40.52,42.02 U7.3 ; v1(41.175,61.625) C50.2 ; v1(45.25,53.25) C39.2 ; C58.2 v1(45.25,70.75) ; U4.10 v1@49.23,25.48 ; U4.12 v1@49.23,28.02 ; U7.10 v1@48.98,39.48 ; U7.12 v1@49.23,42.02 ; C47.1 49.4,60.75 v1(50.75,60.75) ; C38.2@50.25,53.5 v1(52.25,53.5) ; C17.2 v1(52.65,27.65) ; C29.2 v1(52.65,39.85) ; C51.2@52.5,66.15 v1(52.5,67.5) ; v1(52.6,32.85) C21.1 ; v1(54,55) C42.1 ; C52.1@54.5,66.15 v1(54.5,67.5) ; v1(55.5,38.25) 55.775,37.975 U5.1 ; C5.2 v1(56.1,16.75) ; U5.14@56.425,29.525 U5.14 56.9,29.525 57,29.425 v1(57,28.25) ; C56.1 v1(57.25,69) ; C14.1 v1@59.25,26 ; C30.1 v1(59.5,41.5) ; C57.2 v1(59.25,69) ; C43.1 v1(60.75,57.25) ; v1(61.25,46.25) 61.325,46.175 U8.3 ; v1@61.5,46.5 61.825,46.825 U8.2 ; v1(63.25,49.5) C37.2 ; v1(63.8,28.25) U5.15 ; U5.28 v1(63.8,39.25) ; U2.4 v1(64,16.75) ; C32.1 v1@67.5,43.5 ; C7.2 v1(66.6,16.75) ; C53.1 v1(67.25,67.75) ; C54.2 v1(69.25,67.75) ; C4.2 v1(69.5,17.5) ; v1@70,42 C31.1 ; C22.2@70.25,33.6 v1@71.6,33.6
  Top Layer w0.7: C63.1@19.25,79.25 v1(19.25,80.25) ; C63.1@20.75,79.25 v1(20.75,80.25) ; C62.2@26.75,79.25 v1(26.75,80.25) ; C62.2@28.25,79.25 v1(28.25,80.25)
  Top Layer w1: C1.2@49.25,7.8 v1(49.25,9.5) ; C1.2@50.75,7.8 v1(50.75,9.5)
  Top Layer w1.2: C66.1 v1(17.25,79.25) ; C67.2 v1(30.25,79.25) ; C68.2@38.25,78 v1(38.25,79.35) ; C64.2@40.25,78 v1(40.25,79.35) ; C69.2 v1(48,79.25) ; C65.2 v1(50,79.25)
  other v1: 23.25,16.25 28.4,22.85 33.25,23.5 28.4,24.85 40.25,25.5 49.25,25.5 59.5,26 40.25,28 49.25,28 71.75,33.75 40.25,39.5 49.25,39.5 70,41.75 40.25,42 49.25,42 67.75,43.5 33.25,44 28.25,60.4 60.5,61 60.5,62.5 63,64.75 35.5,69.15 28.25,70.65
INT/EXT_IN: P1.5 U9.6 U13.6 | length 62.3
  Top Layer w0.2: U9.6 30.575,56.325 v1(30.75,56.15)
  Top Layer w0.4: U13.6 v1@30.675,66.575 ; v1(30.75,56.15) 30.85,56.15 v1@30.925,56.225
  Bottom Layer w0.2: v1(30.75,56.15) 30.75,58.15 31.25,58.65 31.25,64.65 30.75,65.15 v1(30.75,66.65) 33.35,66.65 34.085,65.915 35.665,65.915 36.485,66.735 65.015,66.735 68.75,63 75.33,63 P1.5
IOUT+: P4.1 U11.1 U11.2 | length 12.4
  Top Layer w0.4: v1(13,63.5) 13.155,63.5 13.953,62.703 ; U11.2 14.115,61.635 13.75,62 13.75,62.5 13.953,62.703 ; U11.1 14.155,62.905 13.953,62.703
  Bottom Layer w0.4: v1(13,63.5) 13,67.54 P4.1
IOUT-: P4.2 U11.6 U11.7 | length 12.9
  Top Layer w0.4: v1(17.75,61.75) 17.865,61.635 U11.7 21.115,61.635 21.5,61.25 21.5,60.75 21.115,60.365 U11.6
  Bottom Layer w0.4: P4.2 15.5,64.25 17.75,62 v1(17.75,61.75)
MISO_ADC: P1.7 R36.1 | length 7.4
  Top Layer w0.2: R36.1 70.77,61.38 P1.7
MOSI_DAC: P1.23 U5.10 | length 23
  Top Layer w0.2: U5.10 60.375,32.125 v1(60.75,32.5)
  Bottom Layer w0.2: v1(60.75,32.5) 61.5,32.5 62,33 66.75,33 74.81,41.06 P1.23
NetC1_1: C1.1 R4.2 U1.3 | length 10.8
  Top Layer w0.4: U1.3@42.55,12.435 C1.1@50.5,12.435 ; C1.1@50.85,12.6 R4.2
NetC3_1: C3.1 R1.1 R2.2 R3.2 U3.2 | length 11
  Top Layer w0.2: R2.2@23.75,7.85 R2.2@24,8.1
  Top Layer w0.4: U3.2 22.115,10.215 C3.1 ; R2.2 R1.1 C3.1 ; R3.2 C3.1
NetC3_2: C3.2 R1.2 R5.1 U3.1 | length 9.1
  Top Layer w0.4: R5.1 19.35,13.1 20.05,13.8 U3.1 20.845,12.095 19.85,11.1 C3.2 R1.2
NetC5_1: C5.1 U2.8 | length 3.3
  Top Layer w0.4: C5.1 57.29,12.4 57.845,11.845 U2.8
NetC10_1: C10.1 R8.2 R9.2 R10.1 U4.6 | length 12.7
  Top Layer w0.4: R10.1 C10.1 39.9,23.9 40.21,24.21 U4.6 ; U4.6@42.55,24.21 43.79,24.21 44.25,23.75 44.25,20.75 R8.2
NetC11_1: C11.1 U4.9 U5.16 | length 23.7
  Top Layer w0.2: U4.9@47.1,24.46 U4.9@47.31,24.25
  Top Layer w0.4: U4.9 U4.9@47.35,24.21 ; U4.9@47.31,24.25 U4.9@47.35,24.21 ; U5.16 65.075,30.175 65.42,29.83 65.42,28.485 60.835,23.9 C11.1 49.6,23.9 49.29,24.21 U4.9@47.35,24.21
NetC11_2: C11.2 R8.1 U4.8 U5.18 | length 28.9
  Top Layer w0.4: R8.1 47.2,21.2 U4.8 49.06,22.94 49.9,22.1 C11.2 59.856,22.1 66,28.244 66,30.496 65.021,31.475 U5.18
NetC12_1: C12.1 R6.2 R12.1 U3.6 | length 11.6
  Top Layer w0.2: U3.6@23.285,17.715 U3.6@23.285,18.8
  Top Layer w0.4: R12.1 C12.1 22.9,20.985 23.385,20.5 U3.6 ; U3.6@23.285,17.715 24.15,16.85 24.85,16.85 25.85,17.85 R6.2@26.75,17.85
NetC12_2: C12.2 R11.1 R12.2 U3.7 | length 9.3
  Top Layer w0.2: R12.2@20.9,24.75 R12.2@21.1,24.95
  Top Layer w0.4: R11.1@18.4,24.75 R12.2@20.9,24.75 ; R12.2@21.35,24.95 21.35,21.4 22.115,20.635 U3.7
NetC13_2: C13.2 R7.2 R13.2 U3.5 | length 8.5
  Top Layer w0.4: U3.5 24.655,20.755 25.25,21.35 ; C13.2@25,22.85 R13.2@25,24.85 ; C13.2@25.25,22.85 25.25,21.35 ; R7.2@26.75,19.85 25.25,21.35
NetC18_1: C18.1 R14.1 R18.2 R19.2 U4.2 | length 12.9
  Top Layer w0.4: R14.1 C18.1 39.9,29.6 40.21,29.29 U4.2 43.79,29.29 44.25,29.75 44.25,32.75 R18.2
NetC19_1: C19.1 U4.13 U5.13 | length 10.3
  Top Layer w0.4: U4.13 49.29,29.29 49.6,29.6 51,29.6 C19.1@51.25,29.85 ; C19.1 52.35,29.6 52.925,30.175 U5.13
NetC19_2: C19.2 R18.1 U4.14 U5.11 | length 12.6
  Top Layer w0.4: R18.1 47.2,32.3 U4.14 48.81,30.56 49.65,31.4 51,31.4 51.075,31.475 U5.11
NetC20_1: C20.1 R16.1 R23.1 U6.1 | length 9.2
  Top Layer w0.4: R23.1 19.995,36.9 U6.1 21.095,34.095 20.35,33.35 C20.1 R16.1
NetC20_2: C20.2 R15.2 R16.2 R17.2 U6.2 | length 10.5
  Top Layer w0.4: U6.2 22.365,31.965 C20.2 ; R15.2 R16.2 C20.2 ; R17.2 C20.2
NetC24_1: C24.1 R21.2 R22.2 R24.1 U7.6 | length 12.9
  Top Layer w0.4: R24.1 C24.1 39.9,37.9 40.21,38.21 U7.6 43.71,38.21 44.25,37.67 44.25,34.75 R21.2
NetC25_1: C25.1 U5.2 U7.9 | length 10.2
  Top Layer w0.4: U7.9 49.29,38.21 49.6,37.9 C25.1 52.35,37.9 52.925,37.325 U5.2
NetC25_2: C25.2 R21.1 U5.4 U7.8 | length 12.4
  Top Layer w0.4: R21.1 47.2,35.2 U7.8 48.81,36.94 49.65,36.1 C25.2 ; C25.2@51.325,36.025 U5.4
NetC33_1: C33.1 R27.1 R31.2 R32.2 R33.1 U7.2 | length 15.4
  Top Layer w0.4: R27.1 C33.1 39.9,43.6 40.21,43.29 U7.2 43.71,43.29 44.17,43.75 R32.2@44.17,46.75 ; R32.2 43.84,46.75 R31.2 R33.1
NetC34_1: C34.1 U5.27 U7.13 | length 23.7
  Top Layer w0.2: U7.13@47.1,43.04 U7.13@47.31,43.25
  Top Layer w0.4: U7.13 49.04,43.29 49.35,43.6 C34.1 60.83,43.6 65.5,38.93 65.5,37.75 65.075,37.325 U5.27
NetC34_2: C34.2 R31.1 U5.25 U7.14 | length 29
  Top Layer w0.4: R31.1 47.2,46.3 U7.14 48.81,44.56 49.65,45.4 C34.2 59.85,45.4 66.08,39.17 66.08,37.08 65.025,36.025 U5.25
NetC35_2: C35.2 R26.2 R30.2 U6.5 | length 8.8
  Top Layer w0.4: U6.5 24.905,43.155 25.35,43.6 ; R30.2@25.35,46.85 25.35,44.85 25.35,43.6 ; R26.2 25.35,43.6
NetC36_1: C36.1 R28.1 R29.2 U6.7 | length 9.1
  Top Layer w0.4: R28.1 R29.2 21.35,43.4 22.365,42.385 U6.7
NetC36_2: C36.2 R25.2 R29.1 U6.6 | length 10.8
  Top Layer w0.2: C36.2@23.15,44.85 C36.2@23.385,44.615
  Top Layer w0.4: R29.1 23.15,44.85 23.15,43.1 23.635,42.615 U6.6 ; U6.6@23.635,39.715 24.5,38.85 25.35,38.85 26.35,39.85 R25.2
NetC39_1: C39.1 R35.2 U12.5 | length 5
  Top Layer w0.4: U12.5 43.345,56.495 43.44,56.4 C39.1
NetC40_1: C40.1 U10.5 U12.6 U12.7 | length 21.9
  Top Layer w0.2: 56.75,61.425 56.825,61.5 U10.5
  Top Layer w0.4: U12.6 44.615,58 45.885,58 ; C40.1 47.25,57.5 46.75,58 45.885,58 ; 56.75,61.425 51.825,61.425 51.25,62 47,62 45.885,60.885 U12.7 45.885,58
NetC40_2: C40.2 R34.2 R35.1 | length 9.5
  Top Layer w0.4: R34.2 R35.1 43.25,53.25 44.25,52.25 46.25,52.25 47.25,53.25 C40.2
NetC42_2: C42.2 U10.7 | length 5.6
  Top Layer w0.2: 54.75,60.5 U10.7
  Top Layer w0.4: C42.2 54,59.75 54.75,60.5
NetC43_2: C43.2 U10.8 | length 3.2
  Top Layer w0.2: 58.6,59.35 U10.8
  Top Layer w0.4: C43.2 57.6,58.35 58.6,59.35
NetC56_2: C56.2 C57.1 U10.1 | length 4.6
  Top Layer w0.2: U10.1 58.6,65.2 C57.1
  Top Layer w0.4: C56.2 C57.1
NetC58_1: C58.1 R38.2 U12.3 | length 5.5
  Top Layer w0.4: R38.2 C58.1 44.75,67.1 44.75,66.5 44.615,66.365 U12.3
NetC59_1: C59.1 U10.4 U12.1 U12.2 | length 19.4
  Top Layer w0.2: 56.75,62.075 56.825,62 U10.4
  Top Layer w0.4: U12.2 45.885,66.25 47.155,66.25 ; C59.1@47.155,67.505 47.155,66.25 ; 56.75,62.075 51.995,62.075 51.49,62.58 47.67,62.58 47.155,63.095 U12.1 47.155,66.25
NetC59_2: C59.2 R38.1 R39.2 | length 9.5
  Top Layer w0.4: R39.2 R38.1 43.25,70.75 44.25,71.75 46.25,71.75 47.25,70.75 C59.2
NetD1_1: D1.1 R40.1 | length 2
  Top Layer w0.4: R40.1 D1.1
NetL3_2: L3.2 P5.4 | length 50.7
  Top Layer w1.2: L3.2 22.75,80.5 26,83.75 59.75,83.75 65.87,77.63 P5.4
NetL4_2: L4.2 P5.3 | length 44.8
  Top Layer w1.2: L4.2 24.75,80.25 26.75,82.25 58.75,82.25 63.33,77.67 P5.3
NetR4_1: R4.1 U2.6 | length 5.4
  Top Layer w0.4: R4.1@54.15,14 54.5,14 54.75,13.75 57.25,13.75 57.885,14.385 U2.6
NetR9_1: R9.1 R19.1 R22.1 R32.1 U1.6 U1.7 | length 50.4
  Top Layer w0.4: v1@35.865,11.115 U1.7 ; v1@35.885,12.385 U1.6
  Top Layer w1: v1(35.75,11) v1(35.75,12.25) ; v1(40.5,20.75) R9.1 ; v1(40.5,32.75) R19.1 ; v1(40.5,34.75) R22.1 ; v1(40.5,46.75) R32.1
  Bottom Layer w1: v1(35.75,11) v1(35.75,12.25) 35.75,14.75 40.5,19.5 v1(40.5,20.75) 40.5,23.48 41.385,24.365 41.385,28.865 40.5,29.75 v1(40.5,32.75) v1(40.5,34.75) 40.5,37.75 41.385,38.635 41.385,43.135 40.5,44.02 v1(40.5,46.75)
NetR33_2: R33.2 U8.1 | length 16.3
  Top Layer w0.4: R33.2 54,48.75 55.275,47.475 U8.1
NetR34_1: R34.1 U9.1 W1.2 | length 11.6
  Top Layer w0.4: W1.2@32,52.9 32,54.5 32.525,55.025 U9.1 37.025,55.025 38.4,56.4 R34.1
NetR36_2: R36.2 U10.14 | length 4.8
  Top Layer w0.2: U10.14 67.35,62.5 R36.2
NetR39_1: R39.1 U13.1 W2.2 | length 11.9
  Top Layer w0.4: W2.2 32.15,64.9 32.525,65.275 35.775,65.275 38.1,67.6 R39.1
PREAMP+: J2.9 U11.3 U13.2 W2.1 | length 35.5
  Top Layer w0.4: J2.9@6.83,64.655 7.425,65.25 10.5,65.25 11,64.75 26.75,64.75 28.125,63.375 30.225,63.375 30.35,63.5 30.35,64.35 31.925,65.925 U13.2 ; 11.75,64.655 11.75,62.5 13.885,60.365 U11.3
PREAMP-: J2.8 U9.2 U11.5 W1.1 | length 41.3
  Top Layer w0.4: J2.8@6.83,61.885 7.195,62.25 10.5,62.25 12.75,60 12.75,58.75 18.75,52.75 22,52.75 ; U11.5 21.155,59.095 22,58.25 22,52.75 ; U9.2 31.925,55.675 30.35,54.1 W1.1 22,52.75
SCK_ADC: P1.9 U10.13 | length 14.7
  Top Layer w0.2: U10.13 65.02,62 65.442,61.578 69.422,61.578 72.16,58.84 P1.9
SCK_DAC: P1.21 U5.9 | length 23.9
  Top Layer w0.2: U5.9 59.275,32.775 v1(59.75,33.25)
  Bottom Layer w0.2: v1(59.75,33.25) 60,33.5 66.5,33.5 76.25,43.25 P1.21
VREF: U1.1 U1.2 U1.5 U5.3 U5.12 U5.17 U5.26 | length 62.6
  Top Layer w0.4: U1.5 39.595,13.655 40.5,12.75 40.5,12 41.385,11.115 U1.2 v1@45.25,11.115 ; U1.1 v1@45.25,9.845 ; U5.12 v1@58.675,30.825 ; U5.3 v1@58.675,36.675 ; v1@62.075,30.825 U5.17 ; v1@62.075,36.675 U5.26
  Top Layer w1: v1@45.25,10 v1@45.25,11.115
  Bottom Layer w1: v1(45.25,9.75) 45.25,13.75 55.75,24.25 55.75,30.75 ; v1(62,36.75) 55.75,36.75 55.75,30.75 ; v1@62.075,30.75 v1(58.75,30.75) 55.75,30.75
  other v1: 45.25,11.25 62,30.75 58.75,36.75
X: C10.2 R2.1 R7.1 R10.2 U4.7 | length 32.7
  Top Layer w0.4: R2.1@25.55,7.85 27.6,7.85 31.5,11.75 31.5,19 32.75,20.25 ; R7.1@28.6,19.85 29,20.25 v1(29,21.25) ; v1(31.75,21.25) 32.75,20.25 ; U4.7 40.69,22.94 39.85,22.1 C10.2 R10.2 34.6,22.1 32.75,20.25
  Bottom Layer w0.4: v1(29,21.25) v1@31.5,21.25
Y: C18.2 R14.2 R15.1 R26.1 U4.1 | length 29.9
  Top Layer w0.4: R15.1@26.05,29.85 27.85,29.85 28.75,30.75 v1(29.5,30.75) ; R26.1 31.5,39.25 v1(31.5,37.5) ; v1(31.5,30.75) 32,30.75 32.65,31.4 R14.2 C18.2 39.85,31.4 40.69,30.56 U4.1
  Bottom Layer w0.4: 29,30.75 v1(29.5,30.75) v1(31.5,30.75) v1(31.5,37.5)
Z: C24.2 R3.1 R6.1 R17.1 R24.2 R25.1 U7.7 | length 53.8
  Top Layer w0.4: 27.25,9.85 28.35,9.85 ; R24.2 C24.2 39.85,36.1 40.69,36.94 U7.7
  Top Layer w0.6: R3.1@25.55,9.85 28.1,9.85 ; R17.1@26.05,31.85 30.5,31.85 ; 28.35,9.85 30.5,12 30.5,38.25 R25.1@29,39.75 ; R6.1@28.55,17.85 30.5,17.85 ; 30.5,36.1 R24.2
  Top Layer w1: R25.1 R25.1@29,39.75
Z+X: J1.6 R5.2 | length 13.9
  Top Layer w0.4: J1.6@6.83,19.75 7.08,20 11.5,20 16.6,14.9 R5.2
Z+Y: J1.8 R23.2 | length 17.1
  Top Layer w0.4: J1.8@6.83,25.25 7.08,25.5 11,25.5 15.25,29.75 15.25,31.6 R23.2
Z-X: J1.7 R11.2 | length 12.2
  Top Layer w0.4: J1.7@6.5,22.25 6.75,22.5 18.15,22.5 R11.2
Z-Y: J1.9 R28.2 | length 24.4
  Top Layer w0.4: J1.9@6.83,27.75 7.33,28.25 11.25,28.25 14,31 14,40.2 R28.2
~CS_ADC: P1.11 R37.1 U10.12 | length 22.8
  Top Layer w0.2: R37.1 61.25,65.4 61.25,61.75 61.5,61.5 U10.12 64.983,61.5 65.284,61.198 69.052,61.198 73.95,56.3 P1.11
~CS_DAC: P1.19 R20.1 U5.8 | length 28.4
  Top Layer w0.2: U5.8 58.175,33.425 v1(59,34.25) ; R20.1 v1(68.25,37)
  Bottom Layer w0.2: v1(59,34.25) 60,34.25 60.37,33.88 66.13,33.88 68.75,36.5 ; v1(68.25,37) 68.75,36.5 ; P1.19 74.5,44.39 74.5,42.25 68.75,36.5
~LDAC: P1.25 U5.21 | length 16.4
  Top Layer w0.2: U5.21 66.325,33.425 67.25,32.5 72,32.5 76.25,36.75 P1.25
pads on no net: U2.1 U2.3 U2.5 U2.7 U5.19 U5.20

## Polygon pours and split planes (outlines as drawn)
-15V on Power "Top-No Net" (solid, pour order 32): 23,53.25 23,11.25 47.75,11.25 47.75,53.25
+5V on Power "Top-No Net" (solid, pour order 22): 69.41,84.75 69.41,21.5 81,21.5 81,84.75
+5V on Power "Top-No Net" (solid, pour order 24): 48.25,37 48.25,30.25 74.75,30.25 74.75,37
-15V on Power "Top-No Net" (solid, pour order 25): 47.66,53.25 47.66,37.5 69,37.5 69,53.25
-15V on Power "Top-No Net" (solid, pour order 26): 1.75,84.75 1.75,72.5 22,72.5 22,84.75
-15V on Power "Top-No Net" (solid, pour order 27): 7.5,84.75 7.5,76.25 35,76.25 35,84.75
+15V on Power "Top-No Net" (solid, pour order 28): 22.5,75.75 22.5,68 34,68 34,75.75
-15V on Power "Top-No Net" (solid, pour order 29): 22.75,67.75 22.75,44.5 27,44.5 27,67.75
-15V on Power "Top-No Net" (solid, pour order 33): 54.25,84.25 54.25,38.25 69,38.25 69,84.25
-15V on Power "Top-No Net" (solid, pour order 34): 34.5,84.75 34.5,63 69,63 69,84.75
+15V on Power "Top-No Net" (solid, pour order 35): 27.25,72.75 27.25,54 34,54 34,72.75
+15V on Power "Top-No Net" (solid, pour order 36): 29.75,62 29.75,54 53.5,54 53.5,62
+15V on Power "Top-No Net" (solid, pour order 31): 29.75,41.5 29.75,23 36,23 36,41.5
+15V on Power "Top-No Net" (solid, pour order 37): 47.75,21 47.75,10.5 81.25,10.5 81.25,21
+15V on Power "Top-No Net" (solid, pour order 21): 1.565,72 22.5,72 22.5,10.5 81.25,10.5 81.25,1.25 1.565,1.25
+15V on Power "Top-No Net" (solid, pour order 30): 21.5,31.75 21.5,23 36,23 36,31.75
-15V on Power "Top-No Net" (solid, pour order 23): 42.831,29.75 42.831,21.331 69,21.331 69,29.75
GND on Bottom Layer "Top-No Net" (solid, pour order 20): 1.5,85 81.25,85 81.25,1.25 1.5,1.25
GND on GND "Top-No Net" (solid, pour order 38): 1.5,1.25 1.5,85 81.25,85 81.25,75 81.25,1.25 1.5,1.25

## Keep-outs
Keep-Out Layer:
  rectangle: 4.5,0 13.5,8.25
  rectangle: 74.5,0 82.75,8.25
  rectangle: 4.5,78.25 13.5,86.5
  rectangle: 74.5,78.25 82.75,86.5
  lines w0.254: 0,0 82.75,0 82.75,86.5 0,86.5 0,0

## Silkscreen, mask and mechanical layers (free items; w line width, h text height)
Top Overlay:
  text "GND" at 69,79 h1.2 r90
  text "+3V3" at 58.75,78.75 h1.2 r90
  text "+5V" at 61.25,78.75 h1.2 r90
  text "+15V" at 63.75,78.75 h1.2 r90
  text "-15V" at 66.25,78.75 h1.2 r90
  text "IOUT" at 13.5,71.75 h1.2
  text "AIN" at 19.5,71.75 h1.2
  text "+" at 17.25,69.75 h1.2
  text "+" at 22.5,69.75 h1.2
  text "GND" at 56.25,45 h1.2 r90
  text "BMOD" at 59,43.75 h1.2 r90
  text "STM Analog REV 1" at 15.6,3.9 h1.25
  text "(c) 2015 Daniel Berard" at 15.5,1.6 h1.25
Mechanical 16:
  lines w0.254: 0,0 0,0

## Text inside footprints (layer, text, board x,y; h text height)
J1: Top Overlay "1" at 13.125,18.21 h1.5 r90; Top Overlay "5" at 13.125,29.04 h1.5 r90; Top Overlay "9" at 3.725,27.655 h1.5 r90; Top Overlay "6" at 3.725,19.345 h1.5 r90
J2: Top Overlay "6" at 3.725,56.345 h1.5 r90; Top Overlay "9" at 3.725,64.655 h1.5 r90; Top Overlay "5" at 13.125,66.04 h1.5 r90; Top Overlay "1" at 13.125,55.21 h1.5 r90
P1: Top Overlay "26" at 78.282,36.996 h1.27 r270; Top Overlay "25" at 75.742,36.996 h1.27 r270; Top Overlay "1" at 75.742,71.54 h1.27 r270; Top Overlay "2" at 78.282,71.54 h1.27 r270